# Altium PCB BioPrinter_Schematics.PcbDoc
Units mil, origin at the board's own origin, x right, y up, seen from the top; angles counter-clockwise.
Board outline 2400 x 3105 mil, 2 copper layers (Top Layer, Bottom Layer); 18 components, 15 nets, 100 pads, 15 vias.
Unrouted connection lines stored in the file: 26.
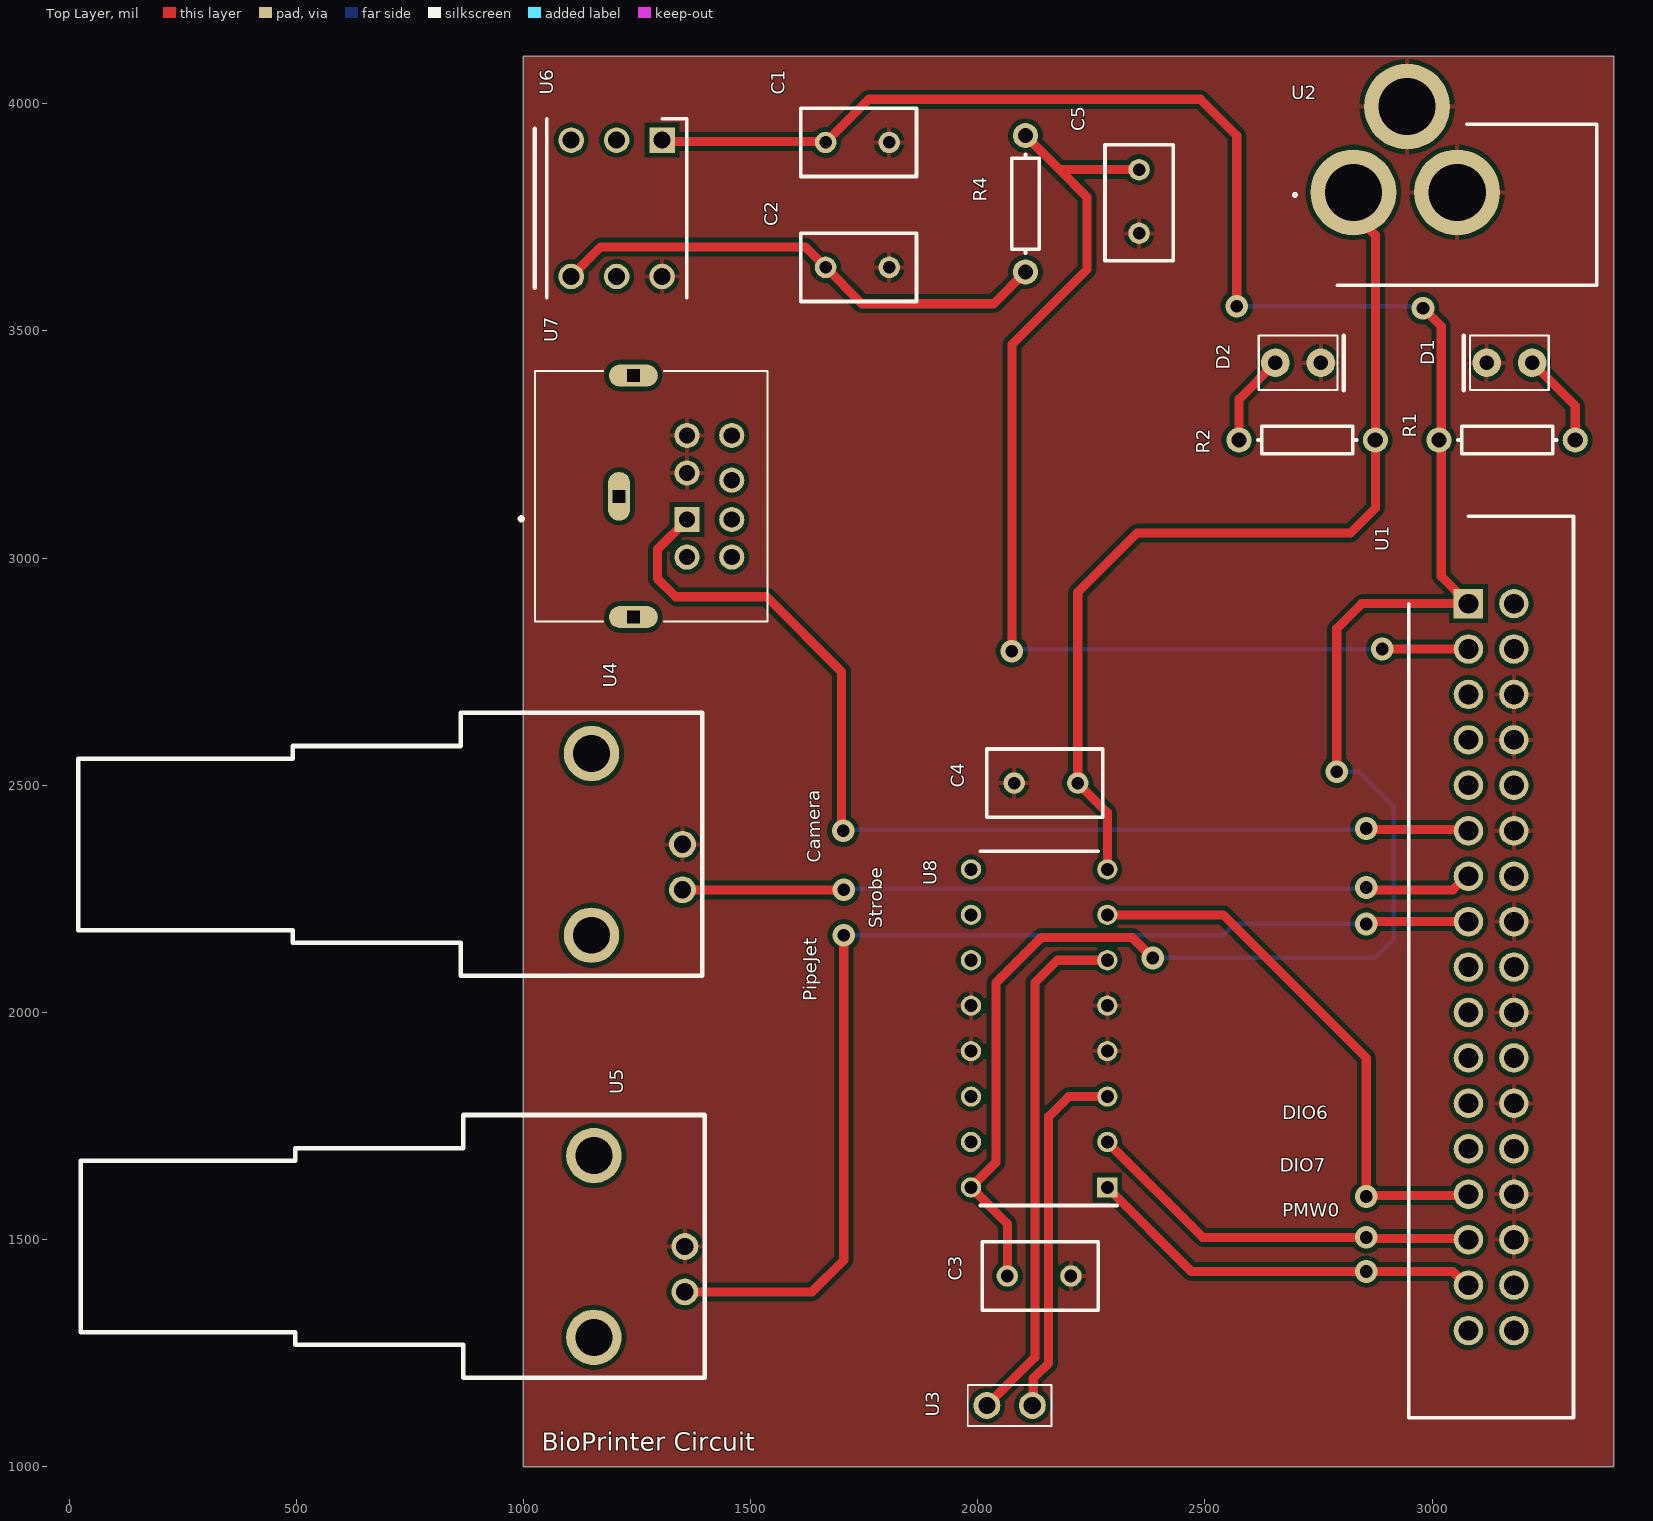
[diagram p0: Top Layer view]
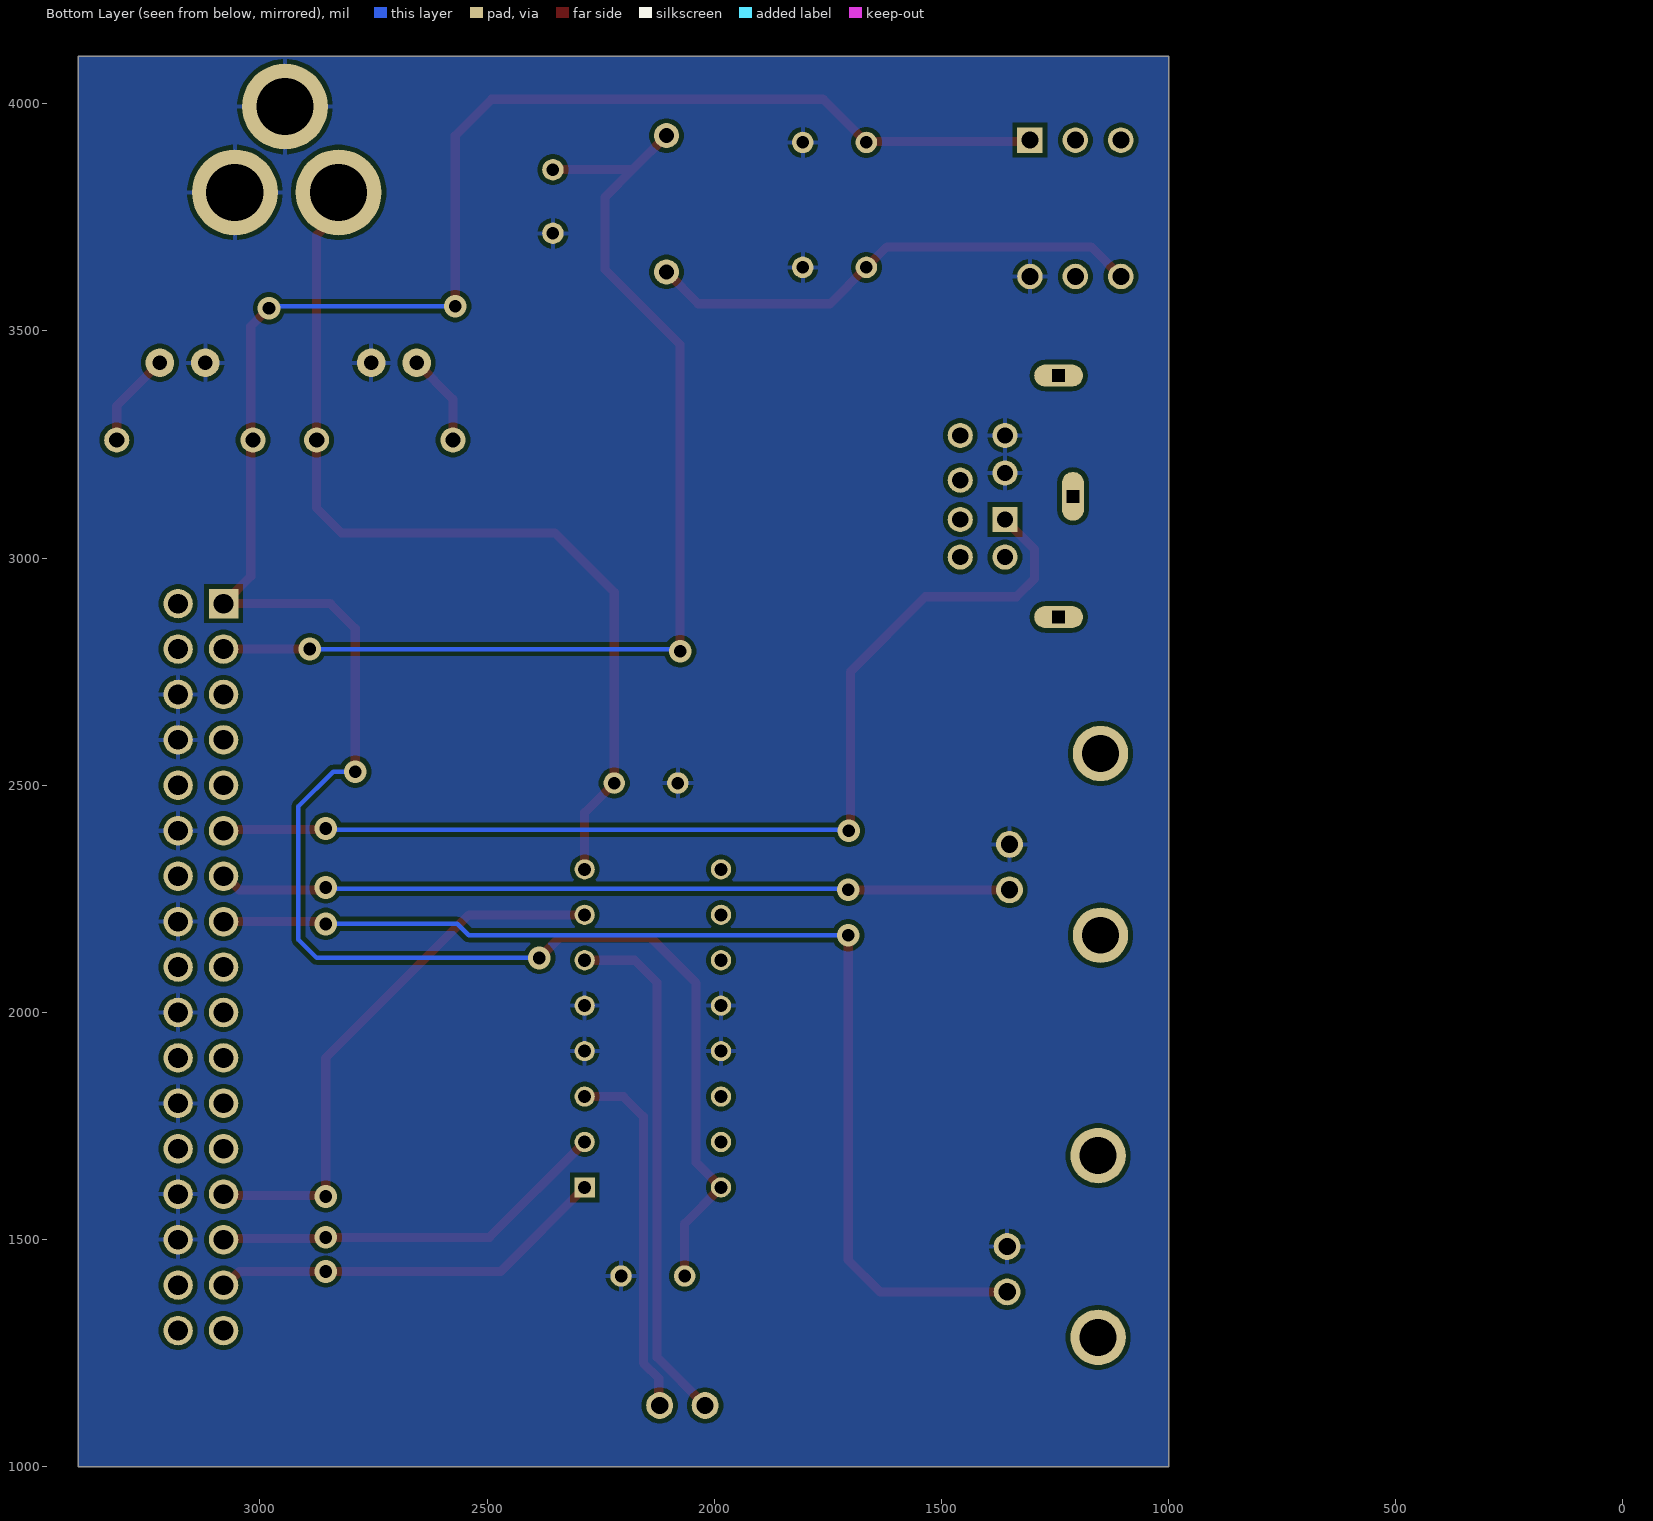
[diagram p1: Bottom Layer view, seen from below]

## Layer stack, top to bottom
Top Solder: solder mask 0.4, Solder Resist, Dk 3.5
Top Layer: signal copper 1.4
Dielectric 1: dielectric 12.6, FR-4, Dk 4.8
Bottom Layer: signal copper 1.4
Bottom Solder: solder mask 0.4, Solder Resist, Dk 3.5

## Board outline
1000,1000 3400,1000 3400,4105 1000,4105

## Design rules (kind name [scope] priority, off if disabled: settings)
Clearance [All] p1: gap=10 ignorepadtopadclearanceinfootprint=FALSE except(0: Arc-Hole Track-Hole SMDPad-Hole THPad-Hole Via-Hole Fill-Hole Poly-Hole Region-Hole Text-Hole)
HoleSize [All] p1: absolutevalues=TRUE maxlimit=200 minlimit=1 maxpercent=80.000 minpercent=20.000
PolygonConnect [All] p1: connectstyle=Relief reliefconductorwidth=10 reliefentries=4 polygonreliefangle="90 Angle" airgapwidth=10
RoutingVias [All] p1: holewidth=28 width=50 viastyle="Through Hole" minholewidth=28 minwidth=50 maxholewidth=28 maxwidth=50
SilkToSolderMaskClearance [IsPad] p1: minsilkscreentomaskgap=0 clearancetoexposedcopper=TRUE
SolderMaskExpansion [All] p1: expansion=4 istentingtop=FALSE
Width [All] p1: maxlimit=20 minlimit=10 preferedwidth=20 toplayer_minwidth=20 bottomlayer_maxwidth=10 bottomlayer_prefwidth=10 minimp=50.000000 maximp=50.000000 favimp=50.000000
28 further rules are at their usual default settings.

## Components (designator, comment, footprint, x,y, rotation, side; value= is the part's Value field where it differs from the comment)
C1 "Cap" RAD-0.3 1735,3915 r180 top value=0.1uF
C2 "Cap" RAD-0.3 1735,3640 r180 top value=0.001uF
C3 "Cap" RAD-0.3 2135,1420 r180 top value=0.1uF
C4 "Cap" RAD-0.3 2150,2505 r0 top value=1uF
C5 "Cap" RAD-0.3 2355,3785 r90 top value=100pF
D1 "LED1" LED-1 3170,3430 r90 top
D2 "LED1" LED-1 2705,3430 r270 top
R1 "Res1" AXIAL-0.3 3165,3260 r180 top value=1K
R2 "Res1" AXIAL-0.3 2725,3260 r0 top value=1K
R4 "Res1" AXIAL-0.3 2105,3780 r90 top value=1K
U1 "75869-106LF" SHDR34W62P254_2X17_5039X920X957P 3080,2900 r270 top
U2 "694106301002" 694106301002_1 3362.09,3954.61 r180 top
U3 "87224-2" 872242 2120,1135 r180 top
U4 "1-1337543-0" 1-1337543-0 1393.78,2370 r90 top
U5 "1-1337543-0" 1-1337543-0 1399.09,1485 r90 top
U6 "1-2199298-1_1" "DIPS762W70P254L762H510Q6N - DUPLICATE" 1305,3920 r270 top
U7 "MD-80SM" CUI_MD-80SM 1210.39,3136.14 r270 top
U8 "L293DNE" DIP762W53P254L1980H508Q16N 2135,1965 r180 top

## Footprints (in the part's own frame and the unit in brackets; to place one, negate y for a bottom-side part, rotate by r counter-clockwise, add the part's x,y. Pads: shape width x height; smd on the part's side, far side on the other; paste and mask are expansions set on the pad)
1-1337543-0 [mm]
  round 1.5 hole 0.97: 1(-2.54,1.112) 2(0,1.112)
  round 3.1 hole 2.06: 3(5.08,6.2) 4(-5.08,6.2)
  silkscreen extent -7.35,0 7.35,34.9, body extent -10,-3.38 10,3.38, height 5.8
872242 [mil]
  round 59.09 hole 38: 1(0,0) 2(100,0)
  silkscreen extent -42,-45 142,45, body extent -42,-46 142,46, height 410
694106301002_1 [mm]
  round 4.8 hole 3.2: 1(13.6,3.8) 2(7.8,3.8) 3(10.6,-1)
  silkscreen extent 0,0 16.93,9, body extent -10,-3.38 10,3.38, height 5.8
AXIAL-0.3 [mm] "Axial Device, Thru-Hole; 2 Leads; 0.3 in Pin Spacing"
  round 1.4 hole 0.85: 1(-3.81,0) 2(3.81,0)
  silkscreen extent -2.77,-0.76 2.77,0.76
CUI_MD-80SM [mm]
  rect 1.408x1.408 / inner round 1.408 / far side rect 1.408x1.408 hole 0.9: 1(1.3,3.8)
  round 1.408 hole 0.9: 2(-1.3,3.8) 3(3.4,3.8) 4(1.3,6.3) 5(-3.4,3.8) 6(3.4,6.3) 7(-0.9,6.3) 8(-3.4,6.3)
  oval 2.73x1.23 hole 0.7 square: S1(0,0)
  oval 1.23x2.73 hole 0.7 square: S2(-6.75,0.8) S3(6.75,0.8)
  silkscreen extent -7,-5.57 7,8.3, body extent -7.02,-5.18 7.02,8.22, height 0.25
DIP762W53P254L1980H508Q16N [mm]
  rect 1.13x1.13 hole 0.73: 1(-3.81,8.89)
  round 1.13 hole 0.73: 2(-3.81,6.35) 3(-3.81,3.81) 4(-3.81,1.27) 5(-3.81,-1.27) 6(-3.81,-3.81) 7(-3.81,-6.35) 8(-3.81,-8.89) 9(3.81,-8.89) 10(3.81,-6.35) 11(3.81,-3.81) 12(3.81,-1.27) 13(3.81,1.27) 14(3.81,3.81) 15(3.81,6.35) 16(3.81,8.89)
  silkscreen extent -4.38,-9.9 3.3,9.9, body extent -3.94,-9.9 3.94,9.9, height 5.08
"DIPS762W70P254L762H510Q6N - DUPLICATE" [mm]
  round 1.425 hole 0.95: 1(7.62,0) 2(7.62,-2.54) 3(7.62,-5.08) 4(0,-5.08) 5(0,-2.54)
  rect 1.425x1.425 hole 0.95: 6(0,0)
  silkscreen extent -1.19,-7.11 8.81,1.37, body extent -1.19,-6.35 8.81,1.27, height 4.82
LED-1 [mm] "LED; 2 Leads"
  round 1.6 hole 0.8: 1(0,-1.27) 2(0,1.27)
  silkscreen extent -1.52,-2.2 1.52,2.54
RAD-0.3 [mm] "Radial Cap, Thru-Hole; 2 Leads; 0.3 in Pin Spacing"
  round 1.2 hole 0.7: 1(-1.778,0) 2(1.778,0)
  silkscreen extent -3.3,-1.91 3.18,1.91
SHDR34W62P254_2X17_5039X920X957P [mm]
  rect 1.65x1.65 hole 1.1: 1(0,0)
  round 1.65 hole 1.1: 2(0,2.54) 3(2.54,0) 4(2.54,2.54) 5(5.08,0) 6(5.08,2.54) 7(7.62,0) 8(7.62,2.54) 9(10.16,0) 10(10.16,2.54) 11(12.7,0) 12(12.7,2.54) 13(15.24,0) 14(15.24,2.54) 15(17.78,0) 16(17.78,2.54) 17(20.32,0) 18(20.32,2.54) 19(22.86,0) 20(22.86,2.54) 21(25.4,0) 22(25.4,2.54) 23(27.94,0) 24(27.94,2.54) 25(30.48,0) 26(30.48,2.54) 27(33.02,0) 28(33.02,2.54) 29(35.56,0) 30(35.56,2.54) 31(38.1,0) 32(38.1,2.54) 33(40.64,0) 34(40.64,2.54)
  silkscreen extent -4.87,-3.33 45.51,5.87, body extent -4.87,-3.36 45.52,5.91, height 9.32

## Part data
C1 C2 C3 C4 C5: "Capacitor", LatestRevisionDate=17-Jul-2002, LatestRevisionNote="Re-released for DXP Platform.", PackageDescription="Radial Cap, Thru-Hole; 2 Leads; 0.3 in Pin Spacing", PackageReference=RAD-0.3, Published=8-Jun-2000, Publisher="Altium Limited"
D1 D2: "Typical RED GaAs LED", LatestRevisionDate=08-Jul-2005, LatestRevisionNote="Mech Layer 1 removed.", PackageDescription="LED; 2 Leads", PackageReference=LED-1, Published=8-Jun-2000, Publisher="Altium Limited"
R1 R2 R4: "Resistor", LatestRevisionDate=17-Jul-2002, LatestRevisionNote="Re-released for DXP Platform.", PackageDescription="Axial Device, Thru-Hole; 2 Leads; 0.3 in Pin Spacing", PackageReference=AXIAL-0.3, Published=8-Jun-2000, Publisher="Altium Limited"
U1: "Connector", Manufacturer_Name="Amphenol Communication Solutions", Mouser Part Number=649-75869-106LF, Arrow Part Number=75869-106LF, Arrow Price/Stock=https://www.arrow.com/en/products/75869-106lf/amphenol-fci, Datasheet Link=https://cdn.amphenol-cs.com/media/wysiwyg/files/drawing/75869.pdf, Height=9.57mm, Manufacturer_Part_Number=75869-106LF, Mouser Price/Stock=https://www.mouser.co.uk/ProductDetail/Amphenol-FCI/75869-106LF/?qs=1mQnGnLk3HrYHDyKPzWixQ%3D%3D
U2: "WURTH ELEKTRONIK - 694106301002 - CONNECTOR, POWER ENTRY, JACK, 3A, 20VDC", Manufacturer_Name="Wurth Elektronik", Mouser Part Number=710-694106301002, Datasheet Link=https://datasheet.datasheetarchive.com/originals/distributors/Datasheets_SAMA/1c153bd2ba42bb51bda59ee4cd9765cd.pdf, Manufacturer_Part_Number=694106301002, Mouser Price/Stock=https://www.mouser.co.uk/ProductDetail/Wurth-Elektronik/694106301002?qs=a9WhcLg8qCwOEkcI62k5mA%3D%3D
U3: "Connector", Manufacturer_Name="TE Connectivity", Mouser Part Number=571-872242, Arrow Part Number=87224-2, Arrow Price/Stock=https://www.arrow.com/en/products/87224-2/te-connectivity?region=europe, Datasheet Link=https://datasheet.datasheetarchive.com/originals/distributors/Datasheets_SAMA/3b9b08c08f06dc562fe3ba32b60fa864.pdf, Height=10.3632mm, Manufacturer_Part_Number=87224-2, Mouser Price/Stock=https://www.mouser.co.uk/ProductDetail/TE-Connectivity/87224-2?qs=ZDXmSm13591yVHBRfmL3UQ%3D%3D
U4 U5: "BNC Ins R/A PCB Skt 50Ohm White", Manufacturer_Name="TE Connectivity", Mouser Part Number=571-1-1337543-0, Datasheet Link=http://www.te.com/commerce/DocumentDelivery/DDEController?Action=srchrtrv&DocNm=1337543&DocType=Customer+Drawing&DocLang=English, Manufacturer_Part_Number=1-1337543-0, Mouser Price/Stock=https://www.mouser.co.uk/ProductDetail/TE-Connectivity-AMP/1-1337543-0?qs=C39VGJgkyqP7s5Z2V1r6VA%3D%3D
U6: "Connector", Arrow Part Number=1-2199298-1, Manufacturer_Name="TE Connectivity", Mouser Part Number=571-1-2199298-1, Arrow Price/Stock=https://www.arrow.com/en/products/1-2199298-1/te-connectivity?region=nac, Datasheet Link=https://www.te.com/commerce/DocumentDelivery/DDEController?Action=showdoc&DocId=Customer+Drawing%7F2199298%7FA%7Fpdf%7FEnglish%7FENG_CD_2199298_A_baseFilename.pdf%7F1-2199298-1, Height=5.1mm, Manufacturer_Part_Number=1-2199298-1, Mouser Price/Stock=https://www.mouser.co.uk/ProductDetail/TE-Connectivity/1-2199298-1?qs=fK8dlpkaUMsQ%252BTzExsKLsw%3D%3D
U7: Package=None, Availability=Unavailable, MF="{'manufacturer': u'CUI'}", MP=MD-80SM, Price=None
U8: "Integrated Circuit", Manufacturer_Name="Texas Instruments", Mouser Part Number=595-L293DNE, Arrow Part Number=L293DNE, Arrow Price/Stock=https://www.arrow.com/en/products/l293dne/texas-instruments?region=nac, Datasheet Link=http://www.ti.com/lit/ds/symlink/l293d.pdf, Height=5.08mm, Manufacturer_Part_Number=L293DNE, Mouser Price/Stock=https://www.mouser.co.uk/ProductDetail/Texas-Instruments/L293DNE?qs=ZA235jQDfbp%2Fp7f5ThcsUA%3D%3D

## Via types
v1: diameter 50, hole 28, Top Layer to Bottom Layer, 15 vias

## Nets (pads, with @x,y where several pads share a name; then routed paths per layer and width w, separated by ;. In a path a pad name is that pad's centre, name@x,y a point inside that pad or via, vN(x,y) a via of type N, cw(c..) or ccw(c..) an arc to the next point about the centre after c; other vN are vias at no path point)
5V: C1.2 C3.2 R1.2 U1.1 U6.6 U8.16 | length 5553.4
  Top Layer w20: U6.6 1307.5,3917.5 1662.5,3917.5 C1.2 1760,4010 2490,4010 2570,3930 v1@2570,3560 ; C3.2 2065,1535 U8.16 2040,1670 2040,2065 2140,2165 2340,2165 v1(2385,2120) ; v1(2790,2530) 2790,2845 2845,2900 U1.1 3020,2960 3020,3265 3020,3510 v1(2980,3550)
  Bottom Layer w10: v1(2385,2120) 2875,2120 2915,2160 2915,2453.77 2838.77,2530 v1(2790,2530) ; v1(2570.19,3554.72) 2985.28,3554.72 v1@2990,3550
12V: C4.2 R2.2 U2.1 U8.8 | length 2083.6
  Top Layer w20: U8.8 2285,2440 C4.2 2220,2925 2350,3055 2820,3055 2875,3110 R2.2 2875,3710.93 2826.65,3759.28 U2.1
AOut: C2.2 R4.1 U6.3 | length 1107.7
  Top Layer w20: U6.3 1170,3685 1620,3685 C2.2 1745,3560 2035,3560 R4.1
AOut_filter: C5.2 R4.2 U1.3 | length 2429.3
  Top Layer w20: v1(2075,2795) 2075,3470 2240,3635 2240,3795 2180,3855 ; R4.2 2180,3855 ; C5.2 2180,3855 ; v1(2890,2800) U1.3
  Bottom Layer w10: v1@2085,2800 v1(2890,2800)
CamTrigger: U1.11 U7.1 | length 2377.4
  Top Layer w20: U7.1 1295,3019.96 1295,2955 1335,2915 1535,2915 1700,2750 v1@1700,2400 ; v1(2855,2405) 2857.5,2402.5 3077.5,2402.5 U1.11
  Bottom Layer w10: v1(1703.54,2399.94) 1706.07,2402.47 2852.47,2402.47 v1(2855,2405)
DirCTRL_1: U1.29 U8.2 | length 884.1
  Top Layer w20: U8.2 2495,1505 v1(2855,1505) 2857.5,1502.5 3077.5,1502.5 U1.29
DirCTRL_2: U1.27 U8.7 | length 1232.5
  Top Layer w20: U8.7 2540,2215 2855,1900 v1(2855,1595) 2857.5,1597.5 3077.5,1597.5 U1.27
EN: U1.31 U8.1 | length 884.1
  Top Layer w20: U8.1 2470,1430 3045.8,1430 3075.8,1400 U1.31
  other v1: 2855,1430
GND: C1.1 C2.1 C3.1 C4.1 C5.1 D1.2 D2.2 U1.6 U1.8 U1.12 U1.16 U1.20 U1.24 U1.28 U1.30 U2.2 U2.3 U4.2 U5.2 U6.1 U7.2 U7.5 U8.4 U8.5 U8.12 U8.13
InkTrigger: U1.15 U5.1 | length 2474.2
  Top Layer w20: U5.1 1635,1385 1705,1455 v1(1705,2170) ; v1@2859.86,2199.86 2860,2200 U1.15
  Bottom Layer w10: v1(1705,2170) 2540.5,2170 2565.5,2195 v1(2855,2195)
MOUT1: U3.1 U8.3 | length 798.1
  Top Layer w20: U3.1 2121.97,1136.97 2121.97,1194.55 2155.76,1228.34 2155.76,1770.76 2200,1815 U8.3
MOUT2: U3.2 U8.6 | length 1154.2
  Top Layer w20: U3.2 2125.76,1240.76 2125.76,2065.76 2175,2115 U8.6
NetD1_1: D1.1 R1.1 | length 209.2
  Top Layer w20: D1.1 3315,3335 R1.1@3315,3260.19
NetD2_1: D2.1 R2.1 | length 203.1
  Top Layer w20: R2.1 2575,3350 D2.1
StrobeTrigger: U1.13 U4.1 | length 1741
  Top Layer w20: U4.1 v1(1705,2270) ; v1@2858.53,2270 3045.8,2270 3075.8,2300 U1.13
  Bottom Layer w10: v1(1705,2270) 1707.5,2272.5 2852.5,2272.5 v1(2855,2275)
pads on no net: U1.2 U1.4 U1.5 U1.7 U1.9 U1.10 U1.14 U1.17 U1.18 U1.19 U1.21 U1.22 U1.23 U1.25 U1.26 U1.32 U1.33 U1.34 U4.3 U4.4 U5.3 U5.4 U6.2 U6.4 U6.5 U7.3 U7.4 U7.6 U7.7 U7.8 U7.S1 U7.S2 U7.S3 U8.9 U8.10 U8.11 U8.14 U8.15

## Polygon pours and split planes (outlines as drawn)
GND on Top Layer "GND_L01_P000" (solid, pour order 0): 1000,1000 1000,4105 3395,4105 3400,4100 3400,1000
GND on Bottom Layer "GND_L02_P001" (solid, pour order 1): 1000,1000 3400,1000 3400,4105 1000,4105

## Silkscreen, mask and mechanical layers (free items; w line width, h text height)
Top Overlay:
  text "Camera" at 1654.86,2329.85 h30 r90.83
  text "Strobe" at 1790,2185 h30 r90
  text "PipeJet" at 1645,2025 h30 r90
  text "DIO6" at 2670,1765 h30
  text "DIO7" at 2665,1650 h30
  text "PMW0" at 2670,1550 h30
  text "BioPrinter Circuit" at 1040,1035 h40